# EAGLE board PCB-CMB-5-SHLD-3x5-1208 (EAGLE 6.5.0)
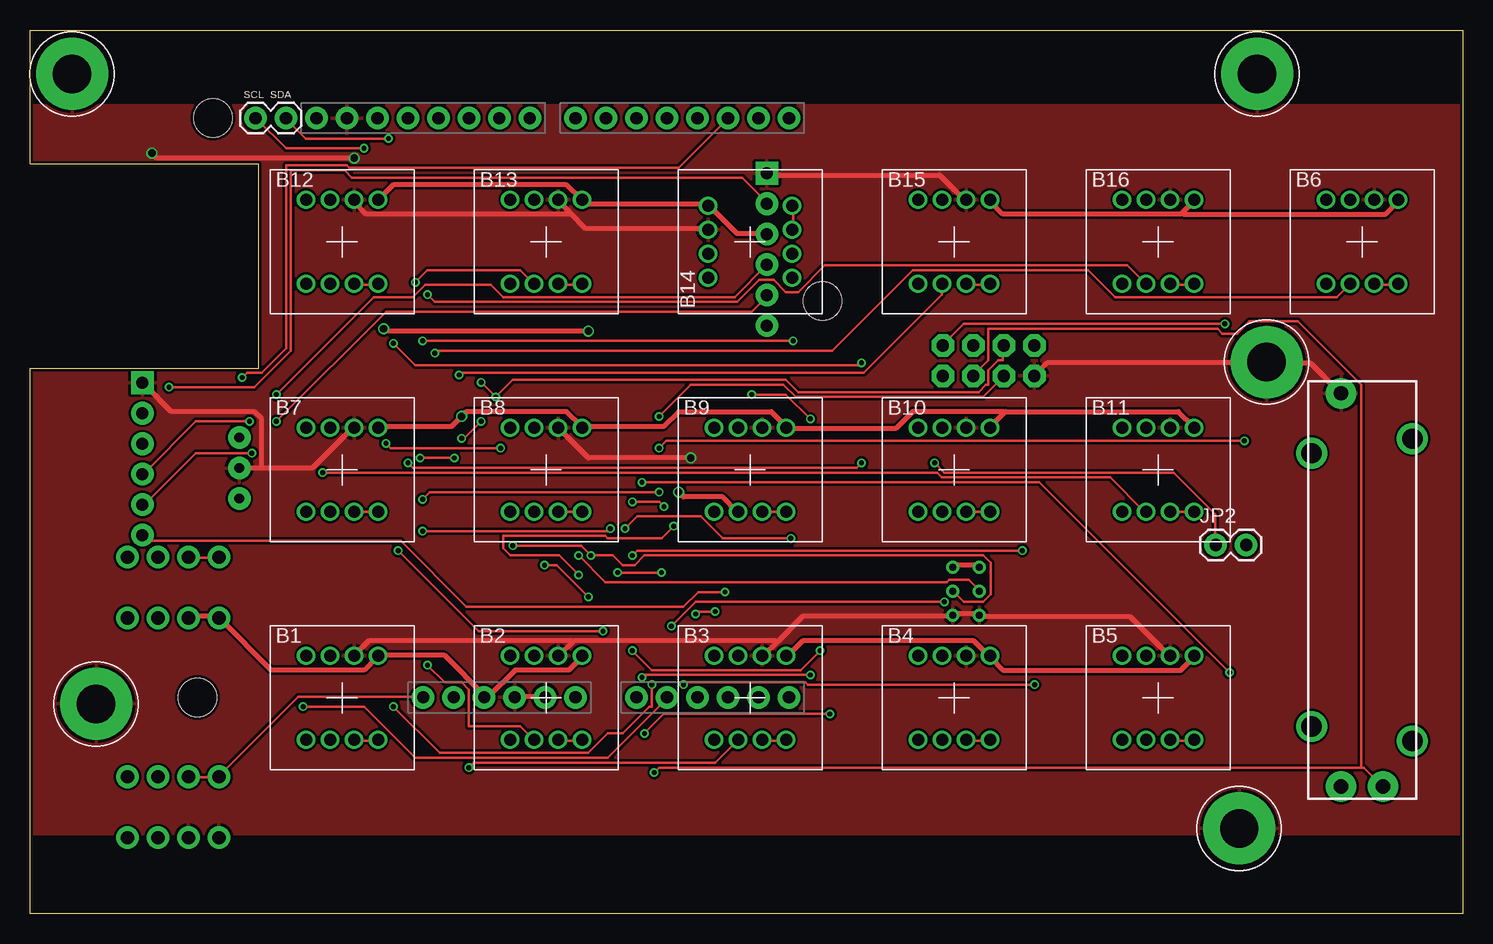
[diagram p0: board, top side]
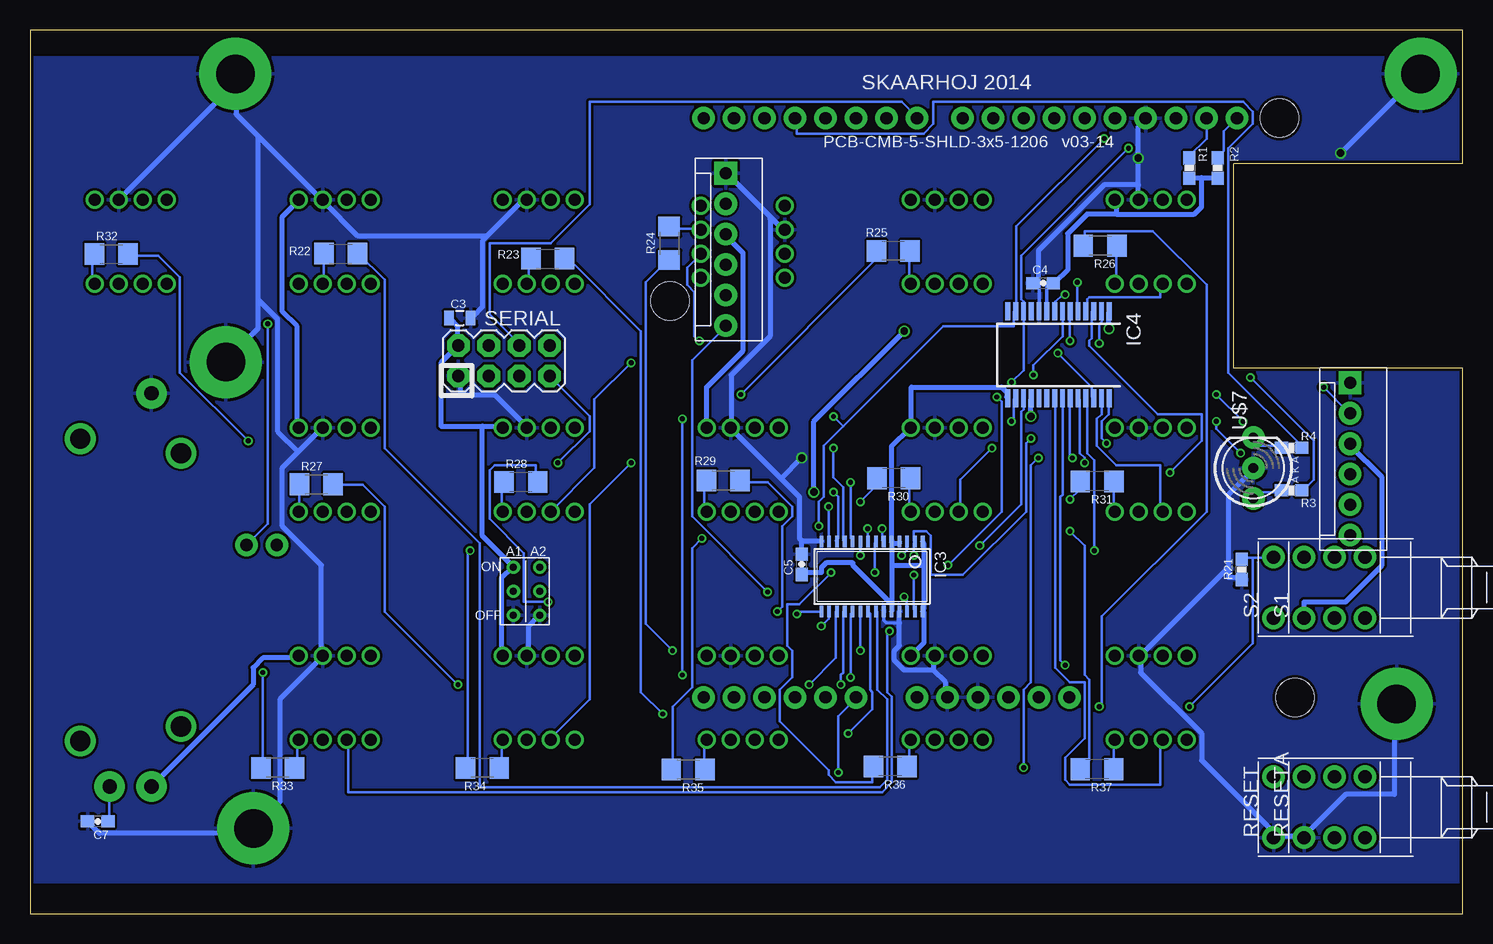
[diagram p1: board, bottom side, seen from below]

Size 119.38 x 73.66 mm. Coordinates in mm from the lower left corner, seen from the top.
Outline: 0,0 0,45.47 19.05,45.47 19.05,62.5 0,62.5 0,73.66 119.38,73.66 119.38,0 0,0
Copper layers (1*16): Top 0.035mm / dielectric 1.5mm / Bottom 0.035mm
Design rules "Fusion_eagle_rule_v1.1": minimum track width 6mil, minimum drill 12mil, track to track 6mil, track to pad 6mil, pad to pad 6mil, via to via 6mil, smd to smd 0mil, copper to edge 10mil, drill to drill 10mil, minimum pad ring 10mil, minimum via ring 6mil, stop-mask expansion 2mil, vias tented up to drill 100mil, thermal gap 10mil
Net classes: 0 default: width 0.203 mm, drill 0.406 mm, clearance 0.203 mm; 1 PWR: width 0.406 mm, drill 0.61 mm, clearance 0.203 mm; 2 RELAY LINES: width 0.305 mm, clearance 0.203 mm; 3 INput lines: clearance 0.203 mm
Holes 3.2 mm at 66.04,51.07 15.24,66.31 13.97,18.05
tRestrict: area 0,0 to 120,6.5; area 0,67.5 to 120,74
bRestrict: area 0,71.5 to 120,74; area 0,0 to 120,2.5

## Footprints (pad centres in the part's own frame; a part is rotated, then mirrored left to right if it is on the bottom)
NKK-NP01 = drill 1: 1 1,3.5; 2 -1,-3.5; L1 3,-3.5; L2 1,-3.5; L3 -1,3.5; L4 -3,3.5; LC1 3,3.5; LC2 -3,-3.5
0805 = smd 0.8 x 1.2: 1 -0.9,0; 2 0.9,0
0603-CAP = smd 1.1 x 1: 1 -0.85,0; 2 0.85,0
DUEMILANOVE_VIAS = drill 1.016 pad 1.88: 3.3V 50.8,13.97; 5V 50.8,16.51; A0 50.8,29.21; A1 50.8,31.75; A2 50.8,34.29; A3 50.8,36.83; A4 50.8,39.37; A5 50.8,41.91; AREF 2.54,2.54; D2 2.54,36.83; D3 2.54,34.29; D4 2.54,31.75; D5 2.54,29.21; D6 2.54,26.67; D7 2.54,24.13; D8 2.54,20.32; D9 2.54,17.78; D10 2.54,15.24; D11 2.54,12.7; D12 2.54,10.16; D13 2.54,7.62; GND@0 50.8,19.05; GND@1 50.8,21.59; GND@2 2.54,5.08; RES 50.8,11.43; RX 2.54,41.91; TX 2.54,39.37; VIN 50.8,24.13
TSSOP28 = smd 0.305 x 0.991: 1 -4.225,-2.918; 2 -3.575,-2.918; 3 -2.925,-2.918; 4 -2.275,-2.918; 5 -1.625,-2.918; 6 -0.975,-2.918; 7 -0.325,-2.918; 8 0.325,-2.918; 9 0.975,-2.918; 10 1.625,-2.918; 11 2.275,-2.918; 12 2.925,-2.918; 13 3.575,-2.918; 14 4.225,-2.918; 15 4.225,2.918; 16 3.575,2.918; 17 2.925,2.918; 18 2.275,2.918; 19 1.625,2.918; 20 0.975,2.918; 21 0.325,2.918; 22 -0.325,2.918; 23 -0.975,2.918; 24 -1.625,2.918; 25 -2.275,2.918; 26 -2.925,2.918; 27 -3.575,2.918; 28 -4.225,2.918
SSOP28 = smd 0.4 x 1.5: 1 -4.225,-3.625; 2 -3.575,-3.625; 3 -2.925,-3.625; 4 -2.275,-3.625; 5 -1.625,-3.625; 6 -0.975,-3.625; 7 -0.325,-3.625; 8 0.325,-3.625; 9 0.975,-3.625; 10 1.625,-3.625; 11 2.275,-3.625; 12 2.925,-3.625; 13 3.575,-3.625; 14 4.225,-3.625; 15 4.225,3.625; 16 3.575,3.625; 17 2.925,3.625; 18 2.275,3.625; 19 1.625,3.625; 20 0.975,3.625; 21 0.325,3.625; 22 -0.325,3.625; 23 -0.975,3.625; 24 -1.625,3.625; 25 -2.275,3.625; 26 -2.925,3.625; 27 -3.575,3.625; 28 -4.225,3.625
1X02 = drill 1.016 pad 1.88: 1 0,0; 2 2.54,0
MOLEX-1X6 = drill 1.016 pad 1.88 square: 1 0,0 | drill 1.016 pad 1.88: 2 2.54,0; 3 5.08,0; 4 7.62,0; 5 10.16,0; 6 12.7,0
SLIDER20 = drill 1.194 pad 2.54: 1 -16.383,1.74; 2A -16.383,-1.74; 3 16.383,1.74 | drill 1.702: P$1 -11.392,4.191; P$2 11.392,4.191; P$3 12.598,-4.191; P$4 -12.598,-4.191
0603-RES = smd 1.1 x 1: 1 -0.85,0; 2 0.85,0
1206 = smd 1.6 x 1.8: 1 -1.4,0; 2 1.4,0
PUSHBUTTON = drill 1.1 pad 1.88: 1 2.54,2.54; 2 2.54,-2.54; 3 -2.54,2.54; 4 -2.54,-2.54
2X4 = drill 1.016 pad 1.88 octagon: 1 -3.81,-1.27; 2 -3.81,1.27; 3 -1.27,-1.27; 4 -1.27,1.27; 5 1.27,-1.27; 6 1.27,1.27; 7 3.81,-1.27; 8 3.81,1.27
3.2MMPAD6MM = drill 3.2 pad 6: P$1 0,0
LED5MM-BICOLOR = drill 0.813 pad 1.88: A2 2.54,0; A3 -2.54,0; K1 0,0
2BITADDR = drill 0.6: A1 0,0; A2 2.2,0; H2 0,2; H3 2.2,2; L2 0,-2; L3 2.2,-2

## Placement (x,y rotation side)
B1  NKK-NP01-SINGLECOLOR  [NKK-NP01]  26,18 0 top
B2  NKK-NP01-SINGLECOLOR  [NKK-NP01]  43,18 0 top
B3  NKK-NP01-SINGLECOLOR  [NKK-NP01]  60,18 0 top
B4  NKK-NP01-SINGLECOLOR  [NKK-NP01]  77,18 0 top
B5  NKK-NP01-SINGLECOLOR  [NKK-NP01]  94,18 0 top
B6  NKK-NP01-SINGLECOLOR  [NKK-NP01]  111,56 0 top
B7  NKK-NP01-SINGLECOLOR  [NKK-NP01]  26,37 0 top
B8  NKK-NP01-SINGLECOLOR  [NKK-NP01]  43,37 0 top
B9  NKK-NP01-SINGLECOLOR  [NKK-NP01]  60,37 0 top
B10  NKK-NP01-SINGLECOLOR  [NKK-NP01]  77,37 0 top
B11  NKK-NP01-SINGLECOLOR  [NKK-NP01]  94,37 0 top
B12  NKK-NP01-SINGLECOLOR  [NKK-NP01]  26,56 0 top
B13  NKK-NP01-SINGLECOLOR  [NKK-NP01]  43,56 0 top
B14  NKK-NP01-SINGLECOLOR  [NKK-NP01]  60,56 90 top
B15  NKK-NP01-SINGLECOLOR  [NKK-NP01]  77,56 0 top
B16  NKK-NP01-SINGLECOLOR  [NKK-NP01]  94,56 0 top
C3  10uF  [0805]  83.57,49.66 0 bottom
C4  100nF  [0603-CAP]  34.95,52.57 0 bottom
C5  100nF  [0603-CAP]  55.07,29.13 90 bottom
C7  10nF  [0603-CAP]  113.73,7.71 180 bottom
GND  ARDUINO_SHIELDNO_SILK  [DUEMILANOVE_VIAS]  21.34,68.85 270 top
IC3  PCA9685  [TSSOP28]  49.21,28.12 180 bottom
IC4  MCP23017SS  [SSOP28]  33.67,46.58 180 bottom
JP2  [1X02]  98.81,30.75 0 top
JP3  [MOLEX-1X6]  61.4,61.72 270 bottom
JP4  [1X02]  21.34,66.31 180 top
JP5  [MOLEX-1X6]  9.36,44.26 270 bottom
POT1  10K Linear  [SLIDER20]  111,27 90 top
R1  1K5  [0603-RES]  22.77,62.15 270 bottom
R2  1K5  [0603-RES]  20.4,62.15 270 bottom
R3  270  [0603-RES]  14.24,35.29 0 bottom
R4  270  [0603-RES]  14.24,38.83 0 bottom
R21  10K  [0603-RES]  18.41,28.72 90 bottom
R22  100R  [1206]  93.48,55.02 0 bottom
R23  100R  [1206]  76.23,54.61 0 bottom
R24  100R  [1206]  66.11,55.89 270 bottom
R25  100R  [1206]  47.44,55.24 180 bottom
R26  100R  [1206]  30.2,55.68 180 bottom
R27  100R  [1206]  95.53,35.81 0 bottom
R28  100R  [1206]  78.48,36.01 0 bottom
R29  100R  [1206]  61.61,36.13 0 bottom
R30  100R  [1206]  47.4,36.3 180 bottom
R31  100R  [1206]  30.45,36.05 180 bottom
R32  100R  [1206]  112.61,54.99 0 bottom
R33  100R  [1206]  98.73,12.17 180 bottom
R34  100R  [1206]  81.68,12.16 180 bottom
R35  100R  [1206]  64.53,12.03 180 bottom
R36  100R  [1206]  47.69,12.28 180 bottom
R37  100R  [1206]  30.47,12.06 180 bottom
RESET  [PUSHBUTTON]  13.21,8.89 90 bottom
RESETA  [PUSHBUTTON]  10.67,8.89 90 bottom
S1  [PUSHBUTTON]  10.67,27.19 90 bottom
S2  [PUSHBUTTON]  13.21,27.19 90 bottom
SERIAL  M04X2  [2X4]  79.88,46.1 0 bottom
U$4  GNDPAD6MM  [3.2MMPAD6MM]  103.05,45.98 0 top
U$7  LEDBICOLOR-AKA  [LED5MM-BICOLOR]  17.44,37.16 90 bottom
U$15  GNDPAD6MM  [3.2MMPAD6MM]  100.77,7.12 0 top
U$18  GNDPAD6MM  [3.2MMPAD6MM]  102.26,70 0 top
U$19  2BITADDR  [2BITADDR]  79.1,26.89 0 bottom
U$20  GNDPAD6MM  [3.2MMPAD6MM]  5.5,17.5 0 top
U$21  GNDPAD6MM  [3.2MMPAD6MM]  3.5,70 0 top

## Library data of the parts
B1-B16 POT1 RESET RESETA S1 S2 U$4 U$7 U$15 U$18-U$21 = SKAARHOJ
C3-C5 C7 GND JP2-JP5 R1-R4 R21-R37 SERIAL = SparkFun
IC3 = wsmith
IC4 = microchip; MF: MICROCHIP; MPN: MCP23017-E/SS; OC_FARNELL: 1467674; OC_NEWARK: 31K2960

## Nets
5V [PWR]: B1.LC1 B2.LC1 B3.LC1 B4.LC1 B5.LC1 B6.LC1 B7.LC1 B8.LC1 B9.LC1 B10.LC1 B11.LC1 B12.LC1 B13.LC1 B14.LC1 B15.LC1 B16.LC1 C3.1 C4.2 C5.1 GND.5V IC3.1 IC3.4 IC3.5 IC3.24 IC3.28 IC4.9 IC4.15 IC4.18 JP3.3 JP5.3 POT1.1 R1.2 R2.2 S1.3 S2.3 SERIAL.2 U$19.H2 U$19.H3
A1: IC3.2 IC4.16 U$19.A1
A1CFG: GND.A1 R21.2 S1.1 S2.1
A2: IC3.3 IC4.17 U$19.A2
D2: GND.D2 R3.2
D3: GND.D3 R4.2
DISP_DATA_OUT: GND.D7 SERIAL.6
GND [PWR]: B1.1 B2.1 B3.1 B4.1 B5.1 B6.1 B7.1 B8.1 B9.1 B10.1 B11.1 B12.1 B13.1 B14.1 B15.1 B16.1 C3.2 C4.1 C5.2 C7.2 GND.GND@0 GND.GND@1 GND.GND@2 IC3.14 IC3.23 IC3.25 IC4.10 JP3.1 JP5.1 POT1.3 R21.1 RESET.3 RESETA.3 SERIAL.1 U$4.P$1 U$7.K1 U$15.P$1 U$18.P$1 U$19.L2 U$19.L3 U$20.P$1 U$21.P$1
GPA0: B1.2 IC4.21
GPA1: B2.2 IC4.22
GPA2: B3.2 IC4.23
GPA3: B4.2 IC4.24
GPA4: B5.2 IC4.25
GPA5: B6.2 IC4.26
GPA6: B7.2 IC4.27
GPA7: B8.2 IC4.28
GPB0 [PWR]: B9.2 IC4.1
GPB1: B10.2 IC4.2
GPB2: B11.2 IC4.3
GPB3: B12.2 IC4.4
GPB4: B13.2 IC4.5
GPB5: B14.2 IC4.6
GPB6: B15.2 IC4.7
GPB7: B16.2 IC4.8
I2C_SCL: IC3.26 IC4.12 JP4.2 R2.1 SERIAL.4
I2C_SDA: IC3.27 IC4.13 JP4.1 R1.1 SERIAL.3
L0: B1.L1 B1.L2 R37.1
L1: B2.L1 B2.L2 R36.1
L2: B3.L1 B3.L2 R35.1
L3: B4.L1 B4.L2 R34.1
L4: B5.L1 B5.L2 R33.1
L5: B6.L1 B6.L2 R32.1
L6: B7.L1 B7.L2 R31.1
L7: B8.L1 B8.L2 R30.1
L8: B9.L1 B9.L2 R29.1
L9: B10.L1 B10.L2 R28.1
L10: B11.L1 B11.L2 R27.1
L11: B12.L1 B12.L2 R26.1
L12: B13.L1 B13.L2 R25.1
L13: B14.L1 B14.L2 R24.1
L14: B15.L1 B15.L2 R23.1
L15: B16.L1 B16.L2 R22.1
N$2: IC3.13 R30.2
N$3: JP3.4 JP5.4
N$7: R4.1 U$7.A2
N$8: JP3.5 JP5.5
N$11: R3.1 U$7.A3
N$12: JP3.2 JP5.2
N$19: IC3.12 R31.2
N$23: IC3.11 R32.2
N$31: IC3.10 R33.2
N$45: JP3.6 JP5.6
N$58: IC3.9 R34.2
N$59: IC3.8 R35.2
N$67: IC3.7 R36.2
N$74: IC3.6 R37.2
N$75: IC3.15 R29.2
N$76: IC3.16 R28.2
N$77: IC3.17 R27.2
N$78: IC3.18 R26.2
N$79: IC3.19 R25.2
N$80: IC3.20 R24.2
N$81: IC3.21 R23.2
N$82: IC3.22 R22.2
RES: GND.RES RESET.1 RESETA.1
SDI_MOSI: JP2.2 SERIAL.8
SDI_SCLK: JP2.1 SERIAL.7
SLIDER_IN: C7.1 GND.A0 POT1.2A SERIAL.5
VIN: GND.VIN

## Tracks (layer width: path | path; a pad name or v marks a point on that pad's centre or on a via)
5V  (via drill 0.61)
  Top 0.406: JP3.3 61.37,56.69 58.93,56.69 56.69,58.93 B14.LC1 56.49,59.13 46.33,59.13 46.13,59.33 B13.LC1 45.92,59.54 44.7,60.76 30.28,60.76 29.06,59.54 B12.LC1 | B7.LC1 29.06,40.64 35.15,40.64 v35.97,41.45 36.37,41.86 44.7,41.86 45.92,40.64 B8.LC1 46.13,40.64 52.83,40.64 54.05,41.86 61.77,41.86 62.99,40.64 B9.LC1 63.2,40.44 72.14,40.44 73.56,41.86 81.08,41.86 81.18,41.76 | S1.3 13.21,24.79 15.65,24.79 S2.3 15.85,24.59 20.12,20.32 27.84,20.32 28.85,21.34 B1.LC1 29.06,21.54 34.54,21.54 38,18.09 GND.5V 38.2,18.09 40.44,20.32 44.91,20.32 45.92,21.34 B2.LC1 | 96.01,58.42 96.93,59.33 B16.LC1 | 96.01,58.42 95.91,58.32 81.08,58.32 80.06,59.33 B15.LC1 | B6.LC1 114,59.33 112.98,58.32 96.11,58.32 96.01,58.42 | 81.18,41.76 80.06,40.64 B10.LC1 | 81.18,41.76 81.28,41.86 95.71,41.86 96.93,40.64 B11.LC1 | U$19.H3 77.01,29.06 79.05,29.06 U$19.H2 | B3.LC1 63.2,21.54 64.41,22.76 78.64,22.76 79.86,21.54 B4.LC1 80.06,21.34 81.08,20.32 95.91,20.32 96.93,21.34 B5.LC1
  Bottom 0.305: C4.2 34.64,52.57 IC4.9
  Bottom 0.406: 21.74,61.37 22.76,61.37 R1.2 | 21.74,61.37 20.52,61.37 R2.2 | 21.74,61.37 21.74,58.93 22.35,58.32 28.85,58.32 | 28.85,58.32 28.85,59.33 B12.LC1 | 28.85,58.32 31.29,58.32 32.92,56.69 32.92,53.65 33.93,52.63 C4.2 | v35.97,41.45 35.97,42.88 IC4.18 | IC4.15 38,43.08 38,43.48 38.41,43.89 45.92,43.89 45.92,40.64 B8.LC1 46.13,40.44 47.55,39.01 47.55,31.09 IC3.5 47.55,30.89 | S1.3 13.21,26.01 9.75,26.01 6.71,29.06 6.71,36.37 9.35,39.01 JP5.3 | 44.91,29.06 44.91,30.89 IC3.1 | 44.91,29.06 44.91,25.4 IC3.28 44.91,25.2 44.91,22.55 45.92,21.54 B2.LC1 | 47.55,30.89 47.55,29.06 | 47.55,29.06 47.55,25.81 | 47.55,25.81 47.55,25.4 IC3.24 | 47.55,30.89 46.94,30.89 IC3.4 | 47.55,25.81 50.8,29.06 50.8,29.26 53.03,29.26 53.44,28.85 53.44,28.45 55.07,28.45 C5.1 | 47.55,29.06 44.91,29.06 | JP3.3 61.37,56.49 59.94,55.07 59.94,46.94 62.99,43.89 62.99,40.64 B9.LC1 | C3.1 84.33,49.58 83.72,48.97 83.72,47.55 SERIAL.2 83.72,47.35 85.14,45.92 85.14,40.64 81.69,40.64 | 81.69,40.64 80.06,40.64 B10.LC1 | B4.LC1 80.06,21.54 80.06,28.04 79.25,28.85 U$19.H2 79.25,29.06 81.69,31.5 81.69,40.64 | POT1.1 109.12,10.77 100.79,19.1 100.79,20.52 99.97,21.34 97.13,21.34 B5.LC1 | B16.LC1 97.13,59.33 98.35,58.12 98.35,50.19 97.13,48.97 97.13,40.64 B11.LC1
A1  (via drill 0.41)
  Top 0.203: v45.72,29.87 47.95,27.64 76.4,27.64 76.61,27.84 78.23,27.84 79.05,27.03 U$19.A1 | v37.59,41.05 36.17,39.62 v35.97,39.62
  Bottom 0.203: v45.72,29.87 45.72,30.89 IC3.2 45.72,31.09 45.72,31.9 44.7,31.9 44.3,31.5 44.3,28.25 41.66,28.25 36.37,33.53 36.37,39.22 v35.97,39.62 | v37.59,41.05 37.39,41.25 37.39,42.88 IC4.16
A1CFG  (via drill 0.41)
  Top 0.203: v22.76,17.27 27.84,17.27 32.11,13.01 48.16,13.01 53.03,17.88 GND.A1 | S1.1 13.21,29.67 15.65,29.67 S2.1
  Bottom 0.203: 17.48,29.67 15.85,29.67 S2.1 | 17.48,29.67 18.29,29.67 R21.2 | v22.76,17.27 17.48,22.55 17.48,29.67
A2  (via drill 0.41)
  Top 0.203: v40.23,30.68 45.92,30.68 v46.74,29.87 48.56,29.87 49.38,29.06 50.39,29.06 51.21,29.87 79.45,29.87 80.06,29.26 80.06,26.62 79.45,26.01 77.83,26.01 77.01,26.82 U$19.A2
  Bottom 0.203: v46.74,29.87 46.33,30.28 46.33,30.89 IC3.3 | v40.23,30.68 36.78,34.14 36.78,41.86 36.58,42.06 36.58,42.88 IC4.17
D2  (via drill 0.41)
  Top 0.203: v17.68,44.7 18.09,45.11 19.3,45.11 21.34,47.14 21.34,62.38 26.42,62.38 26.62,62.18 54.05,62.18 58.12,66.24 GND.D2
  Bottom 0.203: v17.68,44.7 12.39,39.42 12.39,36.17 13.21,35.36 R3.2
D3
  Bottom 0.203: R4.2 13.41,39.01 19.51,45.11 19.51,63.8 17.48,65.84 17.48,66.85 18.29,67.67 44.09,67.67 44.09,65.84 44.91,65.02 55.47,65.02 55.47,66.24 GND.D3
DISP_DATA_OUT
  Bottom 0.203: GND.D7 45.52,66.45 46.74,67.67 72.75,67.67 72.75,59.13 76,55.88 81.08,55.88 81.08,49.99 78.64,47.55 SERIAL.6
GND  (via drill 0.61)
  Top 0.406: 19.3,37.19 17.48,37.19 U$7.K1 | 19.3,37.19 23.57,37.19 26.82,40.44 B7.1 | 19.3,37.19 19.3,41.25 18.69,41.86 11.79,41.86 9.55,44.09 JP5.1 | GND.GND@0 40.44,18.09 42.88,18.09 GND.GND@1 | 62.28,22.66 64.41,24.79 76.81,24.79 U$19.L3 77.01,24.99 79.05,24.99 U$19.L2 79.25,24.79 91.64,24.79 94.89,21.54 B5.1 | 62.28,22.66 61.16,21.54 B3.1 | 45.21,22.66 45.31,22.76 62.18,22.76 62.28,22.66 | 45.21,22.66 44.09,21.54 B2.1 | B1.1 27.03,21.54 28.25,22.76 45.11,22.76 45.21,22.66 | POT1.3 109.12,43.48 106.68,45.92 103.23,45.92 U$4.P$1 103.02,45.92 84.73,45.92 83.72,44.91 SERIAL.1 | v55.07,38 46.53,38 44.09,40.44 B8.1 | 45.01,58.42 46.33,57.1 56.49,57.1 B14.1 | 45.01,58.42 44.09,59.33 B13.1 | B15.1 77.83,59.54 75.79,61.57 61.57,61.57 JP3.1 | B12.1 27.03,59.33 28.04,58.32 44.91,58.32 45.01,58.42 | v10.16,63.4 10.57,62.99 v27.03,62.99
  Bottom 0.254: 48.01,24.26 46.94,24.26
  Bottom 0.305: C4.1 35.29,52.57 IC4.10 | IC3.23 48.23,24.49 48.01,24.26
  Bottom 0.406: 13.21,6.5 15.65,6.5 RESET.3 15.65,6.71 21.74,12.8 21.74,15.04 26.82,20.12 26.82,21.34 B1.1 26.82,21.54 19.51,28.85 | 13.21,6.5 9.75,9.96 5.69,9.96 5.69,17.48 U$20.P$1 | 13.21,6.5 RESETA.3 | 19.51,28.85 19.51,34.95 17.48,36.98 U$7.K1 | 19.51,28.85 19.51,28.04 18.49,28.04 R21.1 | C7.2 114.4,7.52 113.59,6.71 100.79,6.71 100.79,7.11 U$15.P$1 100.58,7.32 98.55,9.35 98.55,17.88 95.1,21.34 B5.1 95.1,21.54 95.1,29.06 98.35,32.31 98.35,37.19 97.03,38.51 | 44.09,20.32 46.53,20.32 47.35,21.13 47.35,21.95 46.94,22.35 46.94,24.26 IC3.25 | 44.09,20.32 44.09,21.34 B2.1 | 44.09,20.32 43.08,19.3 43.08,18.09 GND.GND@1 | U$19.L3 77.01,24.79 77.83,23.98 77.83,21.54 B4.1 | 97.03,38.51 95.1,40.44 B11.1 | B10.1 78.03,40.64 80.67,43.28 83.52,43.28 83.52,44.7 SERIAL.1 | 100.28,64.72 102.21,66.65 102.21,69.29 | 100.28,64.72 95.1,59.54 B16.1 94.89,59.33 92.05,56.49 81.48,56.49 81.38,56.39 | 102.21,69.29 102.21,69.9 U$18.P$1 102.21,69.29 | 102.21,69.29 111.96,59.54 B6.1 | IC3.14 53.44,31.09 55.07,31.09 | 55.07,31.09 55.07,30.07 C5.2 | 55.07,31.09 55.27,31.29 55.27,34.75 56.79,36.27 | 56.79,36.27 60.96,40.44 B9.1 60.96,40.64 60.96,44.91 57.71,48.16 57.71,57.91 57.61,58.01 | 56.79,36.27 v55.07,38 | 27.03,60.76 29.87,60.76 35.36,55.27 35.36,52.63 C4.1 | 27.03,60.76 27.03,59.54 B12.1 | 27.03,60.76 v27.03,62.99 27.03,65.63 26.42,66.24 GND.GND@2 | 81.38,56.39 78.44,59.33 78.03,59.33 B15.1 | 81.38,56.39 81.69,56.08 81.69,50.6 82.5,49.78 C3.2 | 57.61,58.01 61.37,61.77 JP3.1 | 57.61,58.01 56.69,57.1 B14.1 | v10.16,63.4 3.66,69.9 U$21.P$1 | 100.38,51.21 100.38,64.62 100.28,64.72 | 100.38,51.21 100.38,48.77 103.02,46.13 U$4.P$1
  Bottom 0.406: 97.03,38.51 98.75,40.23 98.75,49.58 100.38,51.21
  pour Top: 0,0 120,0 120,74 0,74
  pour Bottom: 0,0 120,0 120,74 0,74
GPA0
  Bottom 0.203: IC4.21 33.93,42.88 33.93,20.52 32.72,19.3 31.5,19.3 31.5,14.63 33.12,13.01 33.12,11.18 32.72,10.77 25.2,10.77 25.2,14.43 B1.2
GPA1  (via drill 0.41)
  Top 0.203: v33.12,20.73 34.54,19.3 35.97,19.3 36.58,18.69 36.58,15.65 40.84,15.65 41.86,14.63 B2.2
  Bottom 0.203: v33.12,20.73 33.53,21.13 33.53,34.75 33.33,34.95 33.33,42.88 IC4.22
GPA2  (via drill 0.41)
  Top 0.203: v35.36,38 v32.51,38 | v36.58,12.19 36.98,12.6 57.1,12.6 58.93,14.43 B3.2
  Bottom 0.203: v32.51,38 32.72,38.2 32.72,42.88 IC4.23 | v35.36,38 35.97,37.39 35.97,19.3 36.58,18.69 v36.58,12.19
GPA3  (via drill 0.41)
  Top 0.203: v31.5,37.59 31.9,37.19 68.89,37.19 v69.29,37.59
  Bottom 0.203: v31.5,37.59 31.5,38 31.9,38.41 31.9,42.88 IC4.24 | v69.29,37.59 72.75,34.14 72.75,17.88 76,14.63 B4.2
GPA4  (via drill 0.41)
  Top 0.203: v30.68,30.28 37.39,23.57 v47.75,23.57
  Bottom 0.203: v30.68,30.28 30.68,37.8 31.29,38.41 31.29,42.88 IC4.25 | v47.75,23.57 47.95,23.37 47.95,18.49 47.55,18.09 47.55,10.97 48.36,10.16 92.86,10.16 92.86,14.43 B5.2
GPA5  (via drill 0.41)
  Top 0.203: v33.73,46.74 33.93,46.94 66.85,46.94 73.56,53.65 88.19,53.65 90.42,51.41 108.92,51.41 109.93,52.43 B6.2
  Bottom 0.203: v33.73,46.74 30.89,43.89 30.89,43.08 IC4.26
GPA6
  Bottom 0.203: IC4.27 30.07,42.88 30.07,41.66 30.48,41.25 30.48,39.01 28.85,37.39 25.2,37.39 25.2,33.53 B7.2
GPA7  (via drill 0.41)
  Top 0.203: v29.67,39.22 30.07,38.81 v39.22,38.81
  Bottom 0.203: v29.67,39.22 30.07,39.62 30.07,41.05 29.46,41.66 29.46,42.88 IC4.28 | v39.22,38.81 41.86,36.17 41.86,33.53 B8.2
GPB0  (via drill 0.61)
  Top 0.406: v29.46,48.77 29.67,48.56 v46.53,48.56 | v54.05,35.15 54.46,34.75 57.71,34.75 58.93,33.53 B9.2
  Bottom 0.406: v29.46,48.77 29.46,50.19 IC4.1 | v46.53,48.56 54.05,41.05 v54.05,35.15
GPB1  (via drill 0.41)
  Top 0.203: v30.28,47.55 32.11,45.72 69.09,45.72 v69.29,45.92
  Bottom 0.203: v30.28,47.55 30.28,49.17 30.07,49.38 30.07,50.19 IC4.2 | v69.29,45.92 72.34,42.88 72.34,37.19 76,33.53 B10.2
GPB2  (via drill 0.41)
  Top 0.203: v24.38,36.78 75.59,36.78 76,36.37 90.02,36.37 92.86,33.53 B11.2
  Bottom 0.203: v24.38,36.78 21.74,39.42 21.74,41.66 25.4,41.66 31.09,47.35 31.09,47.75 30.89,47.95 30.89,50.19 IC4.3
GPB3
  Bottom 0.203: IC4.4 31.29,50.39 31.29,51.21 31.09,51.41 25.2,51.41 25.2,52.43 B12.2
GPB4  (via drill 0.41)
  Top 0.203: v32.11,52.63 33.12,53.65 40.84,53.65 41.86,52.63 B13.2
  Bottom 0.203: v32.11,52.63 32.11,50.39 IC4.5
GPB5  (via drill 0.41)
  Top 0.203: v63.6,47.75 v32.72,47.75
  Bottom 0.203: v32.72,47.75 32.72,50.19 IC4.6 | v63.6,47.75 64.01,48.16 64.01,51.82 64.62,52.43 64.62,53.85 63.6,54.86 B14.2
GPB6  (via drill 0.41)
  Top 0.203: v35.76,44.91 35.97,45.11 69.49,45.11 76,51.61 76,52.43 B15.2
  Bottom 0.203: v35.76,44.91 35.76,45.72 33.33,48.16 33.33,50.19 IC4.7
GPB7  (via drill 0.41)
  Top 0.203: v33.12,51.61 33.73,51 58.93,51 60.76,52.83 61.98,52.83 62.99,51.82 64.01,51.82 66.24,54.05 91.44,54.05 92.86,52.63 B16.2
  Bottom 0.203: v33.12,51.61 33.33,51.61 33.93,51 33.93,50.39 IC4.8
I2C_SCL  (via drill 0.41)
  Top 0.203: v46.53,26.42 43.89,29.06 v42.88,29.06 | v37.59,44.3 v38.81,43.08 40.23,44.5 62.99,44.5 64.01,43.48 79.05,43.48 79.65,44.09 79.86,44.09 79.86,45.31 80.67,46.13 81.08,46.13 81.08,47.35 SERIAL.4 | v27.84,63.8 21.34,63.8 18.9,66.24 JP4.2
  Bottom 0.203: R2.1 20.32,63.2 19.91,63.6 19.91,65.23 18.9,66.24 JP4.2 | v46.53,26.42 46.33,26.21 46.33,25.4 IC3.26 | v42.88,29.06 38.41,33.53 38.41,42.67 v38.81,43.08 | v37.59,44.3 36.58,45.31 36.58,50.19 IC4.12 36.58,50.39 36.58,51 36.78,51.21 36.78,54.86 v27.84,63.8
I2C_SDA  (via drill 0.41)
  Top 0.203: v45.72,28.25 44.09,29.87 40.03,29.87 39.42,30.48 39.42,31.5 47.95,31.5 48.16,31.29 52.63,31.29 v53.65,32.31 | v52.43,41.45 55.07,44.09 62.79,44.09 63.8,43.08 79.45,43.08 81.08,44.7 SERIAL.3 | v29.87,64.62 22.96,64.62 21.34,66.24 JP4.1
  Bottom 0.203: JP4.1 21.34,64.62 22.76,63.2 R1.1 | v45.72,28.25 45.72,25.4 IC3.27 | v53.65,32.31 53.65,34.34 53.24,34.75 53.24,39.01 51.61,40.64 | 51.61,40.64 43.28,48.97 37.39,48.97 37.39,50.19 IC4.13 37.19,50.39 37.19,57.3 v29.87,64.62 | 51.61,40.64 v52.43,41.45
L0
  Top 0.203: B1.L2 27.03,14.43 28.85,14.43 B1.L1
  Bottom 0.203: R37.1 29.06,12.19 29.06,14.43 B1.L1
L1
  Top 0.203: B2.L2 44.09,14.43 45.92,14.43 B2.L1
  Bottom 0.203: R36.1 46.13,12.39 46.13,14.43 B2.L1
L2
  Top 0.203: B3.L2 61.16,14.43 62.99,14.43 B3.L1
  Bottom 0.203: R35.1 63.2,12.19 63.2,14.43 B3.L1
L3
  Top 0.203: B4.L2 78.03,14.43 79.86,14.43 B4.L1
  Bottom 0.203: R34.1 80.26,12.19 80.06,12.39 80.06,14.43 B4.L1
L4
  Top 0.203: B5.L2 95.1,14.43 96.93,14.43 B5.L1
  Bottom 0.203: R33.1 97.33,12.19 97.13,12.39 97.13,14.43 B5.L1
L5
  Top 0.203: B6.L2 112.17,52.43 114,52.43 B6.L1
  Bottom 0.203: R32.1 114.2,54.86 114.2,52.63 B6.L1
L6
  Top 0.203: B7.L2 27.03,33.53 28.85,33.53 B7.L1
  Bottom 0.203: R31.1 29.06,35.97 29.06,33.53 B7.L1
L7
  Top 0.203: B8.L2 44.09,33.53 45.92,33.53 B8.L1
  Bottom 0.203: R30.1 46.13,36.17 46.13,33.53 B8.L1
L8
  Top 0.203: B9.L2 61.16,33.53 62.99,33.53 B9.L1
  Bottom 0.203: R29.1 63.2,35.97 63.2,33.53 B9.L1
L9
  Top 0.203: B10.L2 78.03,33.53 79.86,33.53 B10.L1
  Bottom 0.203: R28.1 80.06,35.97 80.06,33.53 B10.L1
L10
  Top 0.203: B11.L2 95.1,33.53 96.93,33.53 B11.L1
  Bottom 0.203: R27.1 96.93,35.76 96.93,33.53 B11.L1
L11
  Top 0.203: B12.L2 27.03,52.43 28.85,52.43 B12.L1
  Bottom 0.203: R26.1 28.85,55.68 28.85,52.63 B12.L1
L12
  Top 0.203: B13.L2 44.09,52.43 45.92,52.43 B13.L1
  Bottom 0.203: R25.1 46.13,55.07 46.13,52.63 B13.L1
L13
  Top 0.203: B14.L1 63.6,58.93 63.6,57.1 B14.L2
  Bottom 0.203: R24.1 66.04,57.1 63.6,57.1 B14.L2
L14
  Top 0.203: B15.L1 79.86,52.43 78.03,52.43 B15.L2
  Bottom 0.203: R23.1 77.83,54.46 77.83,52.63 B15.L2
L15
  Top 0.203: B16.L1 96.93,52.43 95.1,52.43 B16.L2
  Bottom 0.203: R22.1 94.89,54.86 94.89,52.63 B16.L2
N$2  (via drill 0.41)
  Top 0.203: v52.83,33.93 52.43,34.34 v50.19,34.34
  Bottom 0.203: v52.83,33.93 52.83,31.09 IC3.13 | v50.19,34.34 48.97,35.56 48.97,36.17 R30.2
N$3  (via drill 0.41)
  Top 0.203: v18.29,41.05 13.82,41.05 9.55,36.78 JP5.4 | v20.52,43.28 28.65,51.41 31.9,51.41 32.92,52.43 38.41,52.43 39.42,51.41 58.73,51.41 61.37,54.05 JP3.4
  Bottom 0.203: v20.52,43.28 v18.29,41.05
N$7
  Bottom 0.203: R4.1 15.24,39.01 17.27,39.01 17.27,39.62 U$7.A2
N$8  (via drill 0.41)
  Top 0.203: v18.49,38.41 13.82,38.41 9.55,34.14 JP5.5 | v20.52,41.05 29.67,50.19 60.15,50.19 61.37,51.41 JP3.5
  Bottom 0.203: v18.49,38.41 20.52,40.44 v20.52,41.05
N$11
  Bottom 0.203: R3.1 15.24,35.15 17.27,35.15 17.27,34.75 U$7.A3
N$12  (via drill 0.41)
  Top 0.203: v11.58,43.89 18.69,43.89 21.74,46.94 21.74,61.98 26.21,61.98 26.82,61.37 59.33,61.37 61.37,59.33 JP3.2
  Bottom 0.203: v11.58,43.89 9.55,41.86 JP5.2
N$19  (via drill 0.41)
  Top 0.203: v52.43,35.15 33.33,35.15 v32.72,34.54
  Bottom 0.203: v52.43,35.15 52.02,34.75 52.02,31.29 52.22,31.09 IC3.12 | v32.72,34.54 31.9,35.36 31.9,35.97 R31.2
N$23  (via drill 0.41)
  Top 0.203: v52.43,38.81 53.03,39.42 v101.19,39.42
  Bottom 0.203: v52.43,38.81 52.43,36.37 51.61,35.56 51.61,31.09 IC3.11 | v101.19,39.42 106.88,45.11 106.88,53.03 108.71,54.86 111.15,54.86 R32.2
N$31  (via drill 0.41)
  Top 0.203: v51,35.97 84.12,35.97 v99.97,20.12
  Bottom 0.203: v51,35.97 51,31.29 50.8,31.09 IC3.10 | v99.97,20.12 99.97,12.19 R33.2
N$45  (via drill 0.41)
  Top 0.203: v57.91,26.82 55.68,26.82 54.46,25.6 36.37,25.6 30.89,31.09 9.96,31.09 9.55,31.5 JP5.6
  Bottom 0.203: v57.91,26.82 64.21,33.12 64.21,46.13 61.57,48.77 61.57,48.97 JP3.6
N$58  (via drill 0.41)
  Top 0.203: v50.19,29.87 50.6,30.28 v82.7,30.28
  Bottom 0.203: v50.19,29.87 50.19,30.89 IC3.9 | v82.7,30.28 82.91,30.07 82.91,12.19 R34.2
N$59  (via drill 0.41)
  Top 0.203: v49.58,32.11 50.6,33.12 55.88,33.12 57.71,31.29 v63.4,31.29
  Bottom 0.203: v49.58,32.11 49.58,31.09 IC3.8 | v63.4,31.29 64.21,30.48 64.21,18.9 65.84,17.27 65.84,12.19 R35.2
N$67  (via drill 0.41)
  Top 0.203: v52.63,28.45 v48.97,28.45
  Bottom 0.203: v48.97,28.45 48.97,30.89 IC3.7 | v52.63,28.45 55.27,25.81 56.29,25.81 56.29,22.35 55.88,21.95 55.88,19.71 56.9,18.69 56.9,16.05 52.83,11.99 52.83,11.58 52.22,10.97 49.17,10.97 49.17,12.19 R36.2
N$74  (via drill 0.41)
  Top 0.203: v48.36,32.11 48.16,31.9 v32.72,31.9
  Bottom 0.203: v48.36,32.11 48.36,31.09 IC3.6 | v32.72,31.9 31.5,30.68 31.5,19.91 31.09,19.51 31.09,12.8 31.7,12.19 R37.2
N$75  (via drill 0.41)
  Top 0.203: v55.47,24.99 55.68,25.2 v57.1,25.2
  Bottom 0.203: v55.47,24.99 55.47,25.2 IC3.15 | v57.1,25.2 56.69,25.6 56.69,32.31 55.88,33.12 55.88,33.93 57.91,35.97 60.15,35.97 R29.2
N$76  (via drill 0.41)
  Top 0.203: v53.44,23.98 55.47,26.01 v76.2,26.01
  Bottom 0.203: v53.44,23.98 52.83,24.59 52.83,25.2 IC3.16 | v76.2,26.01 78.23,26.01 78.23,30.07 81.08,32.92 81.08,36.98 80.67,37.39 77.22,37.39 77.22,36.17 R28.2
N$77  (via drill 0.41)
  Top 0.203: v54.46,19.1 54.66,19.3 64.62,19.3 64.82,19.1 v83.72,19.1
  Bottom 0.203: v54.46,19.1 52.22,21.34 52.22,25.2 IC3.17 | v83.72,19.1 89.81,25.2 89.81,33.93 91.64,35.76 94.08,35.76 R27.2
N$78  (via drill 0.41)
  Top 0.203: v51.82,19.1 51.82,17.27 51.61,17.27 49.38,15.04 48.16,15.04 46.53,13.41 34.14,13.41 v30.28,17.27
  Bottom 0.203: v51.82,19.1 51.82,19.91 51.61,20.12 51.61,25.2 IC3.18 | v30.28,17.27 30.07,17.48 30.07,24.79 21.34,33.53 21.34,52.43 25.81,56.9 31.5,56.9 31.5,55.88 R26.2
N$79  (via drill 0.41)
  Top 0.203: v51,19.71 51.21,19.91 v65.02,19.91 | v65.02,41.25 62.99,43.28 v60.15,43.28
  Bottom 0.203: v51,19.71 51,24.99 50.8,25.2 IC3.19 | v65.02,41.25 v65.02,19.91 | v60.15,43.28 48.97,54.46 48.97,55.07 R25.2
N$80  (via drill 0.41)
  Top 0.203: v50.19,21.95 51.82,20.32 64.21,20.32 v65.84,21.95
  Bottom 0.203: v50.19,21.95 IC3.20 | v65.84,21.95 68.07,24.18 68.07,52.63 66.24,54.46 R24.2
N$81  (via drill 0.41)
  Top 0.203: v51.21,15.04 52.83,16.66 v66.65,16.66
  Bottom 0.203: v51.21,15.04 49.17,17.07 49.17,18.49 49.38,18.69 49.38,24.99 49.58,25.2 IC3.21 | v66.65,16.66 68.48,18.49 68.48,48.56 74.37,54.46 74.78,54.46 R23.2
N$82
  Bottom 0.203: IC3.22 48.77,25.2 48.77,18.69 47.95,17.88 47.95,11.18 48.56,10.57 81.89,10.57 81.89,30.89 89.81,38.81 89.81,52.83 92.05,55.07 R22.2
RES
  Top 0.203: RESETA.1 13.21,11.38 15.65,11.38 RESET.1 15.85,11.58 22.35,18.09 32.72,18.09 GND.RES
SDI_MOSI  (via drill 0.41)
  Top 0.203: v99.57,49.17 77.83,49.17 76.2,47.55 SERIAL.8
  Bottom 0.203: v99.57,49.17 99.57,32.51 101.19,30.89 JP2.2
SDI_SCLK  (via drill 0.41)
  Top 0.203: v75.39,37.59 76.2,36.78 95.3,36.78 98.75,33.33 98.75,30.89 JP2.1
  Bottom 0.203: v75.39,37.59 72.75,40.23 72.75,41.45 76,44.7 SERIAL.7
SLIDER_IN  (via drill 0.41)
  Top 0.203: v52.02,11.79 52.43,12.19 110.95,12.19 | 110.95,12.19 111.15,12.19 112.57,10.77 POT1.2A | 110.95,12.19 110.95,44.09 105.66,49.38 101.6,49.38 100.58,48.36 99.36,48.36 98.96,48.77 79.86,48.77 79.86,46.13 78.64,44.91 SERIAL.5
  Bottom 0.203: C7.1 112.78,7.72 112.78,10.57 POT1.2A | v52.02,11.79 52.02,16.46 50.6,17.88 GND.A0

## Text on the board
_tsilk: SCL SDA
_bsilk: SKAARHOJ 2014 | PCB-CMB-5-SHLD-3x5-1206 v03-14